# Altium PCB CmosTest20231115V2.PcbDoc (part 1 of 2)
Units mm, origin at the board's own origin, x right, y up, seen from the top; angles counter-clockwise.
Board outline 62.13 x 36.24 mm, 6 copper layers (Top Layer, GND, Signal Layer 1, Signal Layer 2, power, Bottom Layer), stack 1.231 mm thick; 74 components, 61 nets, 321 pads, 164 vias.
Unrouted connection lines stored in the file: 1.
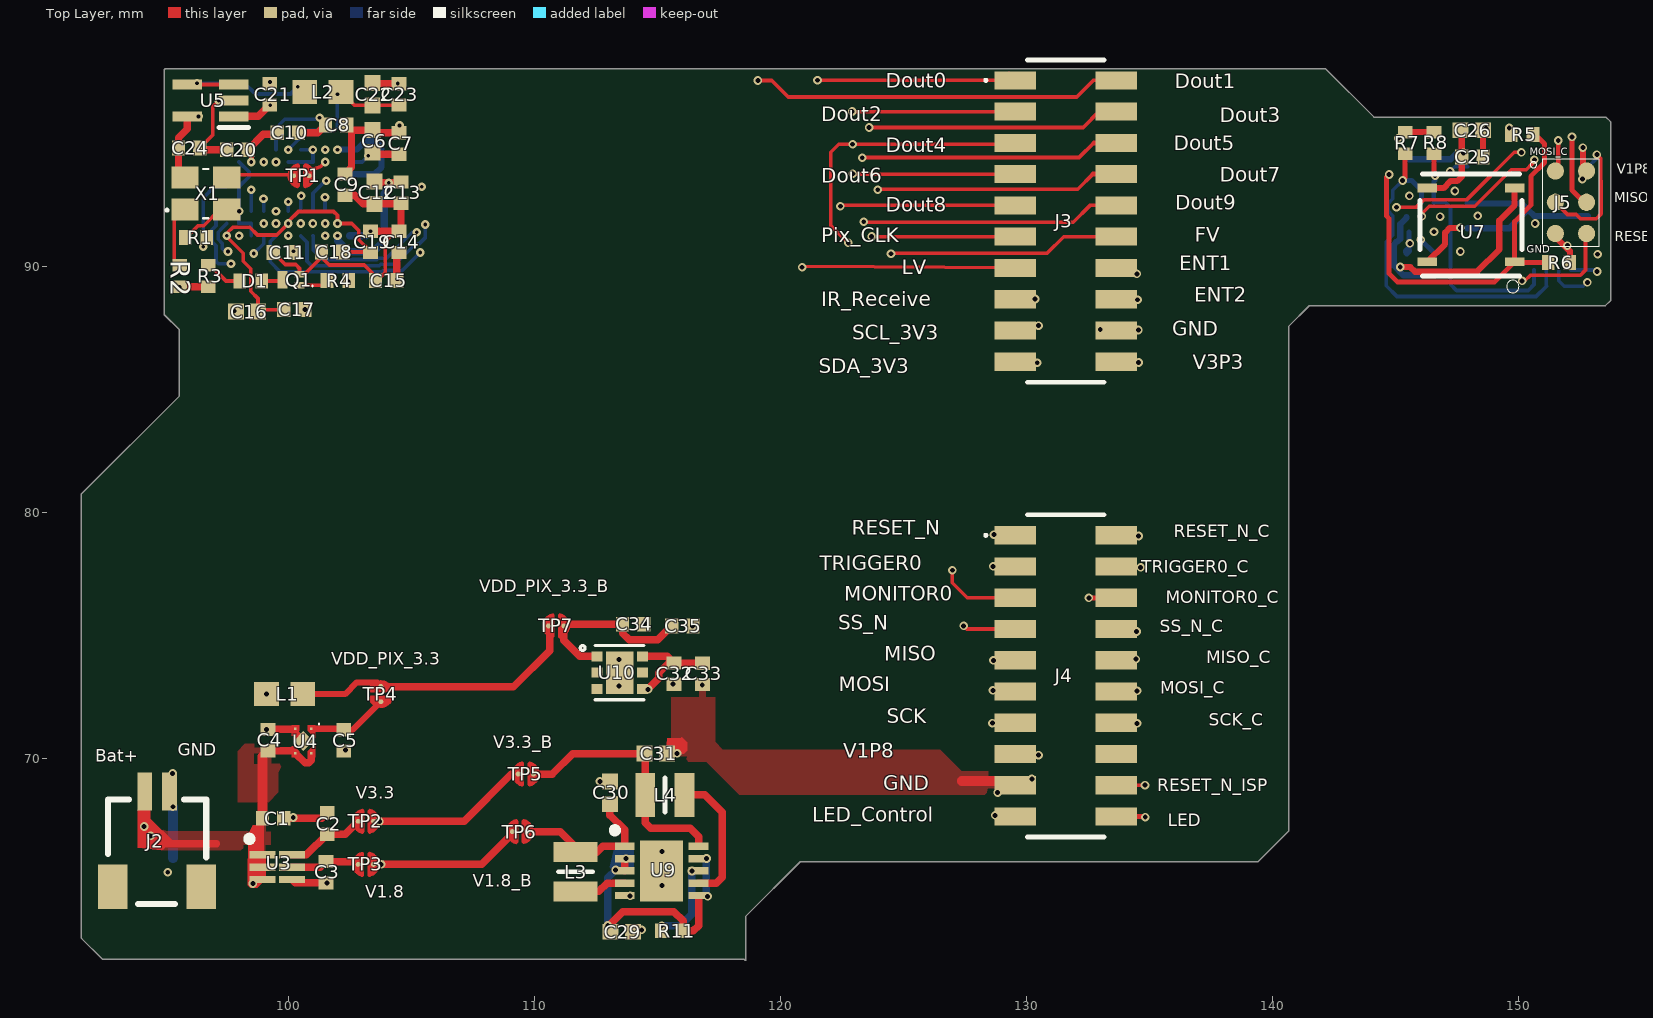
[diagram p0: Top Layer view]
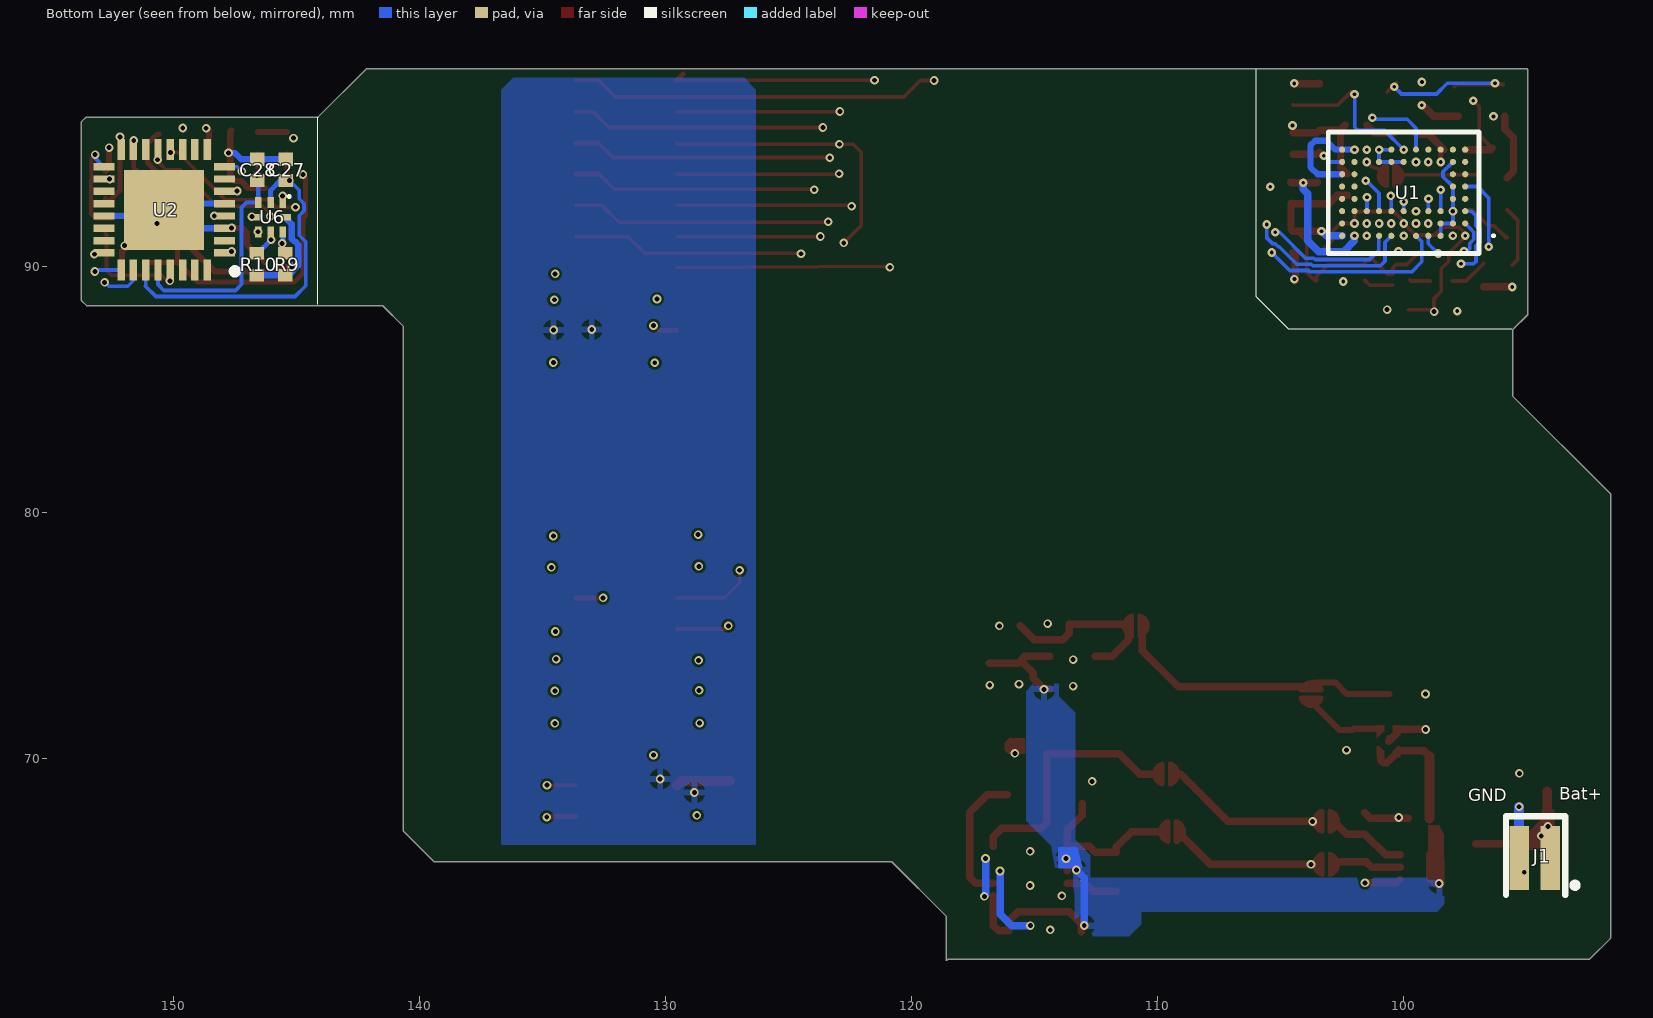
[diagram p1: Bottom Layer view, seen from below]
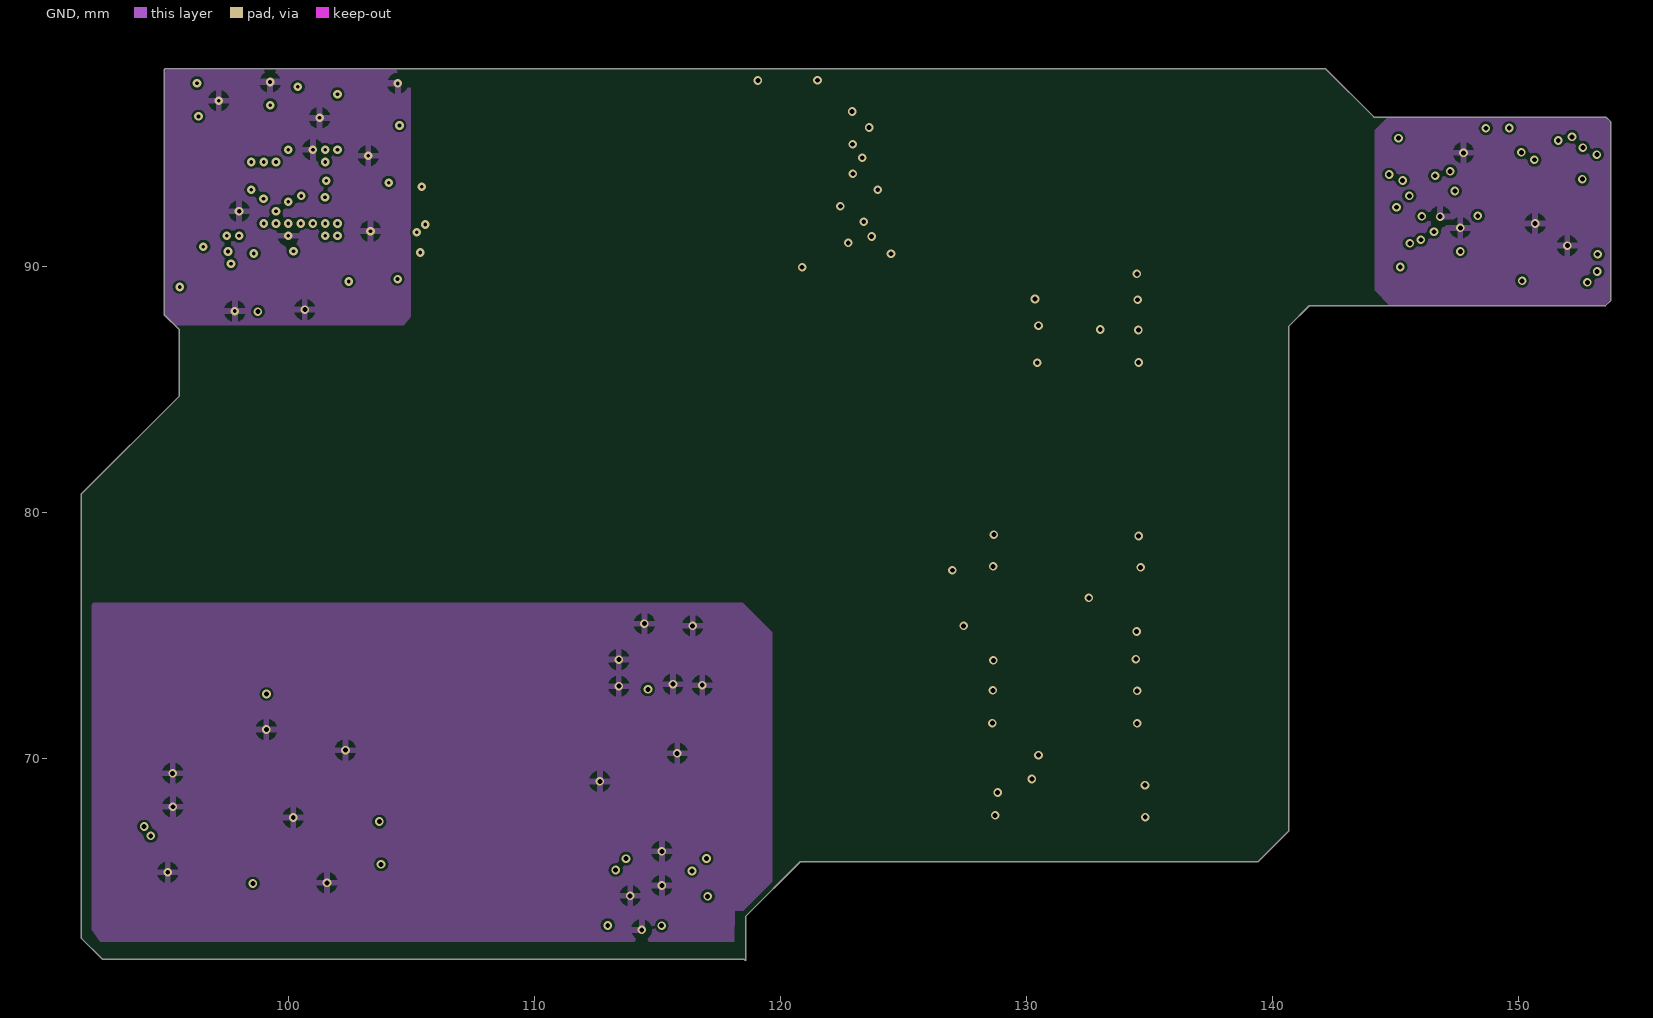
[diagram p2: GND]
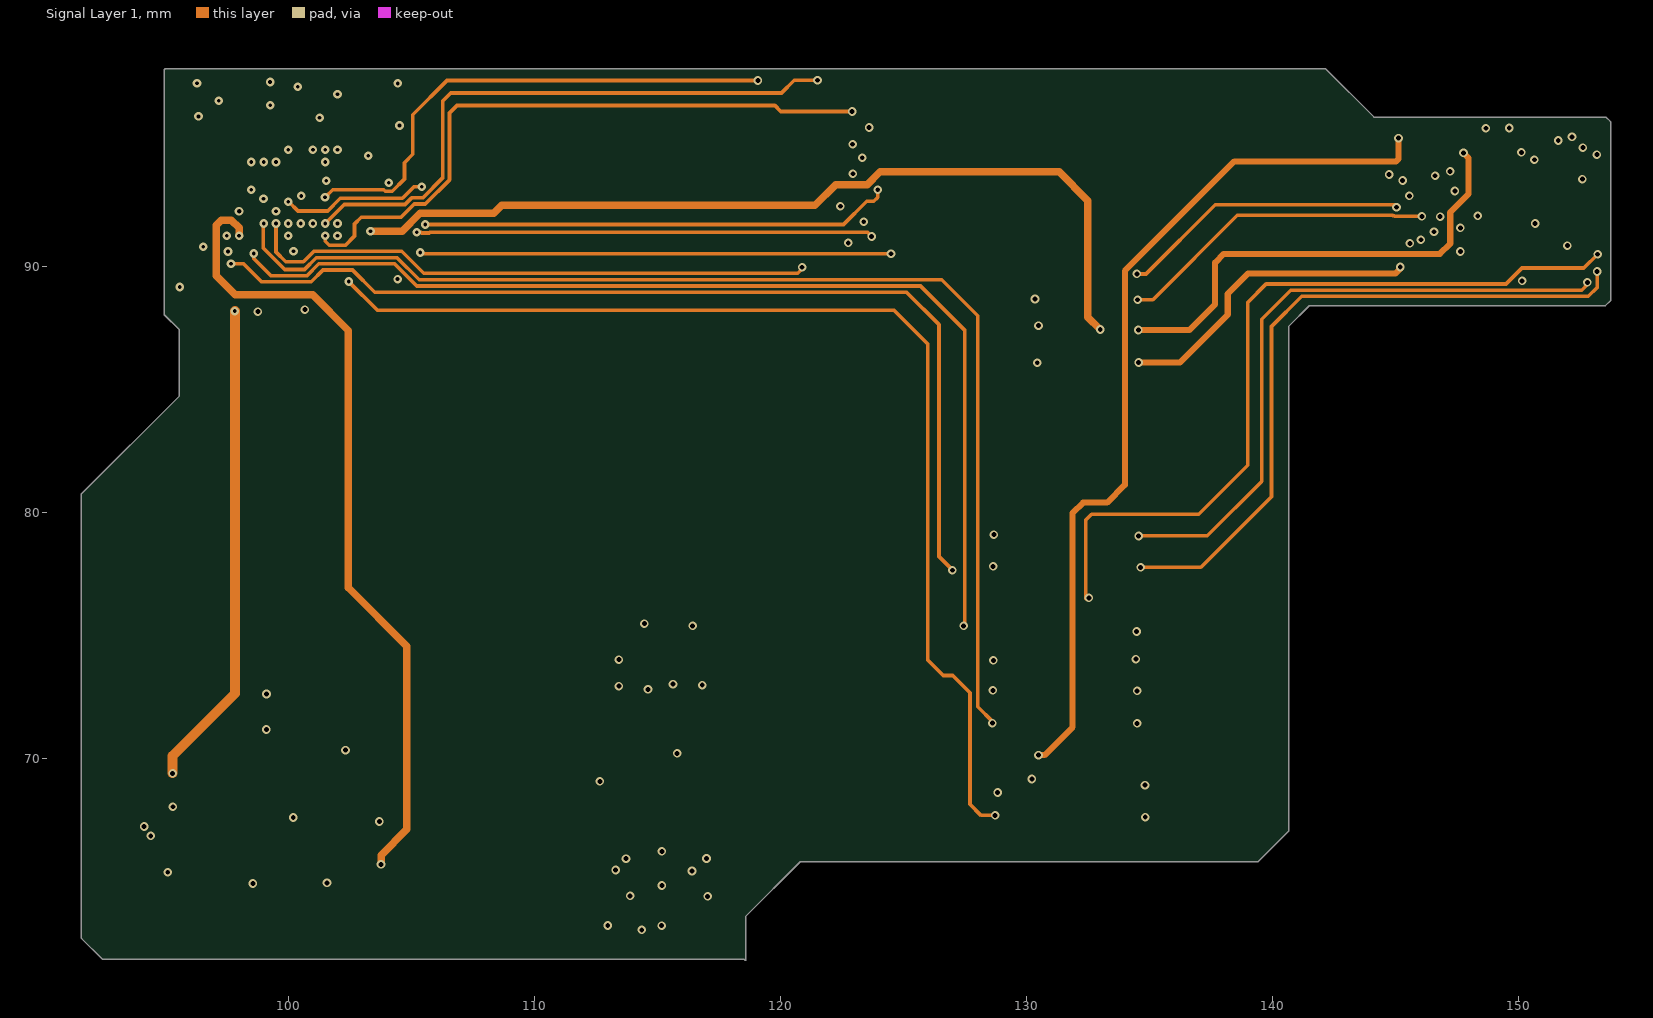
[diagram p3: Signal Layer 1]
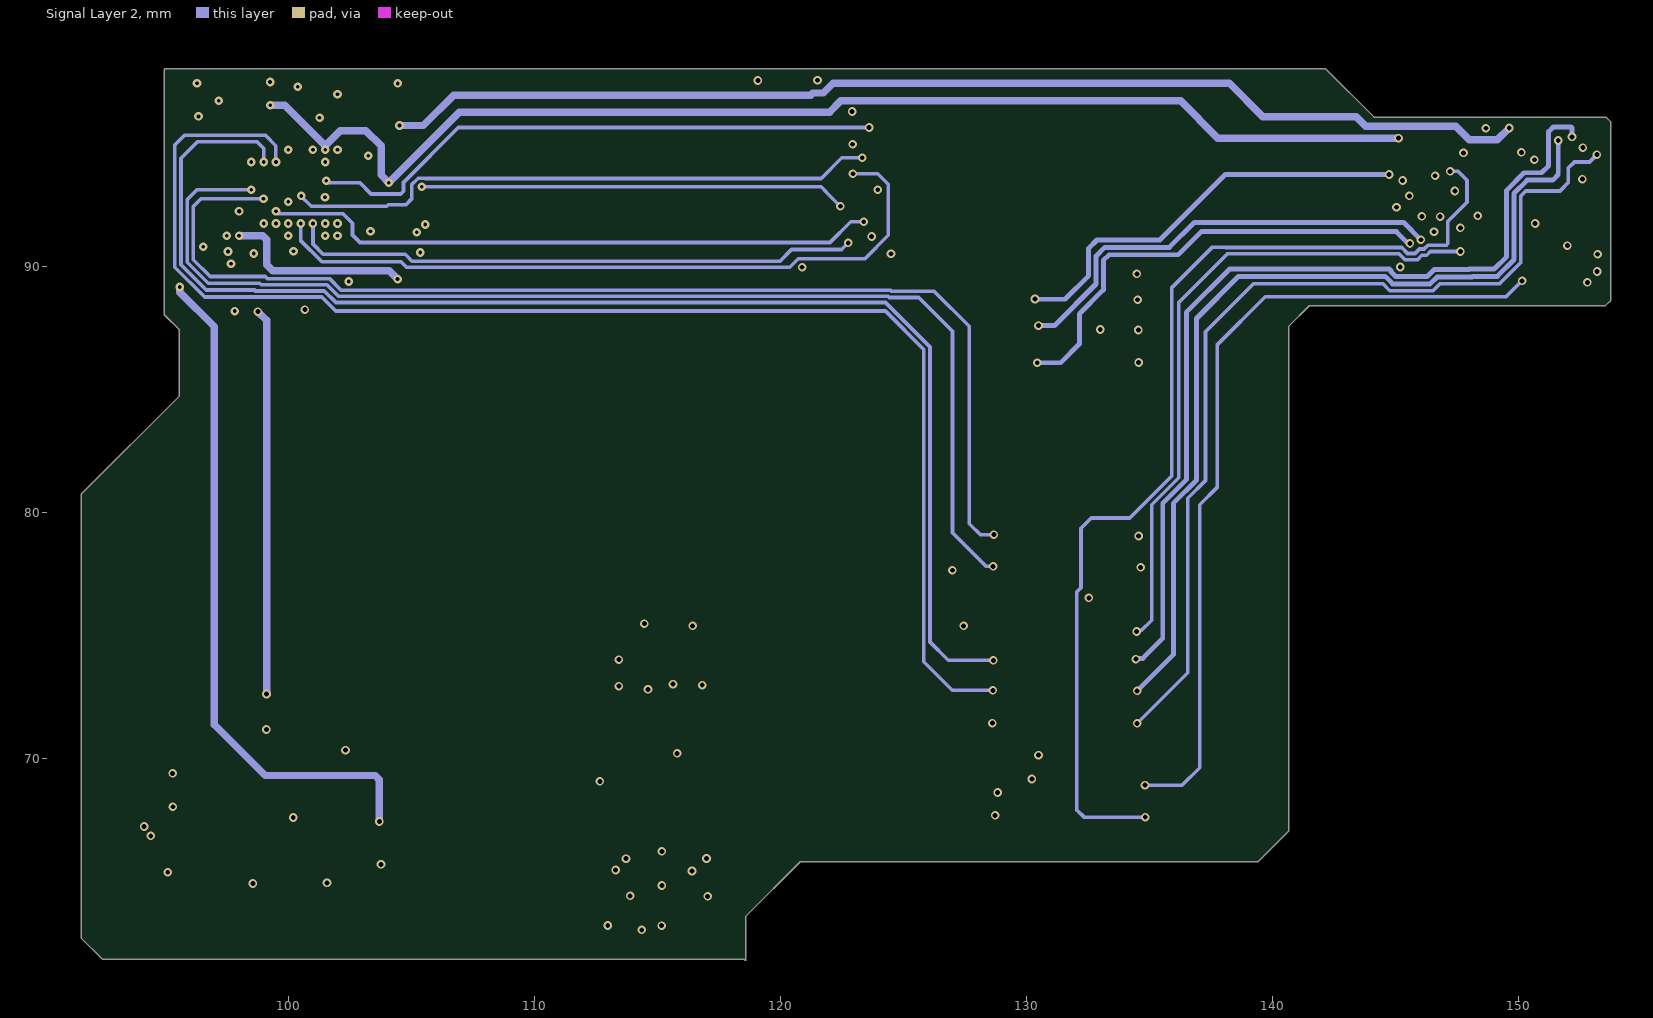
[diagram p4: Signal Layer 2]
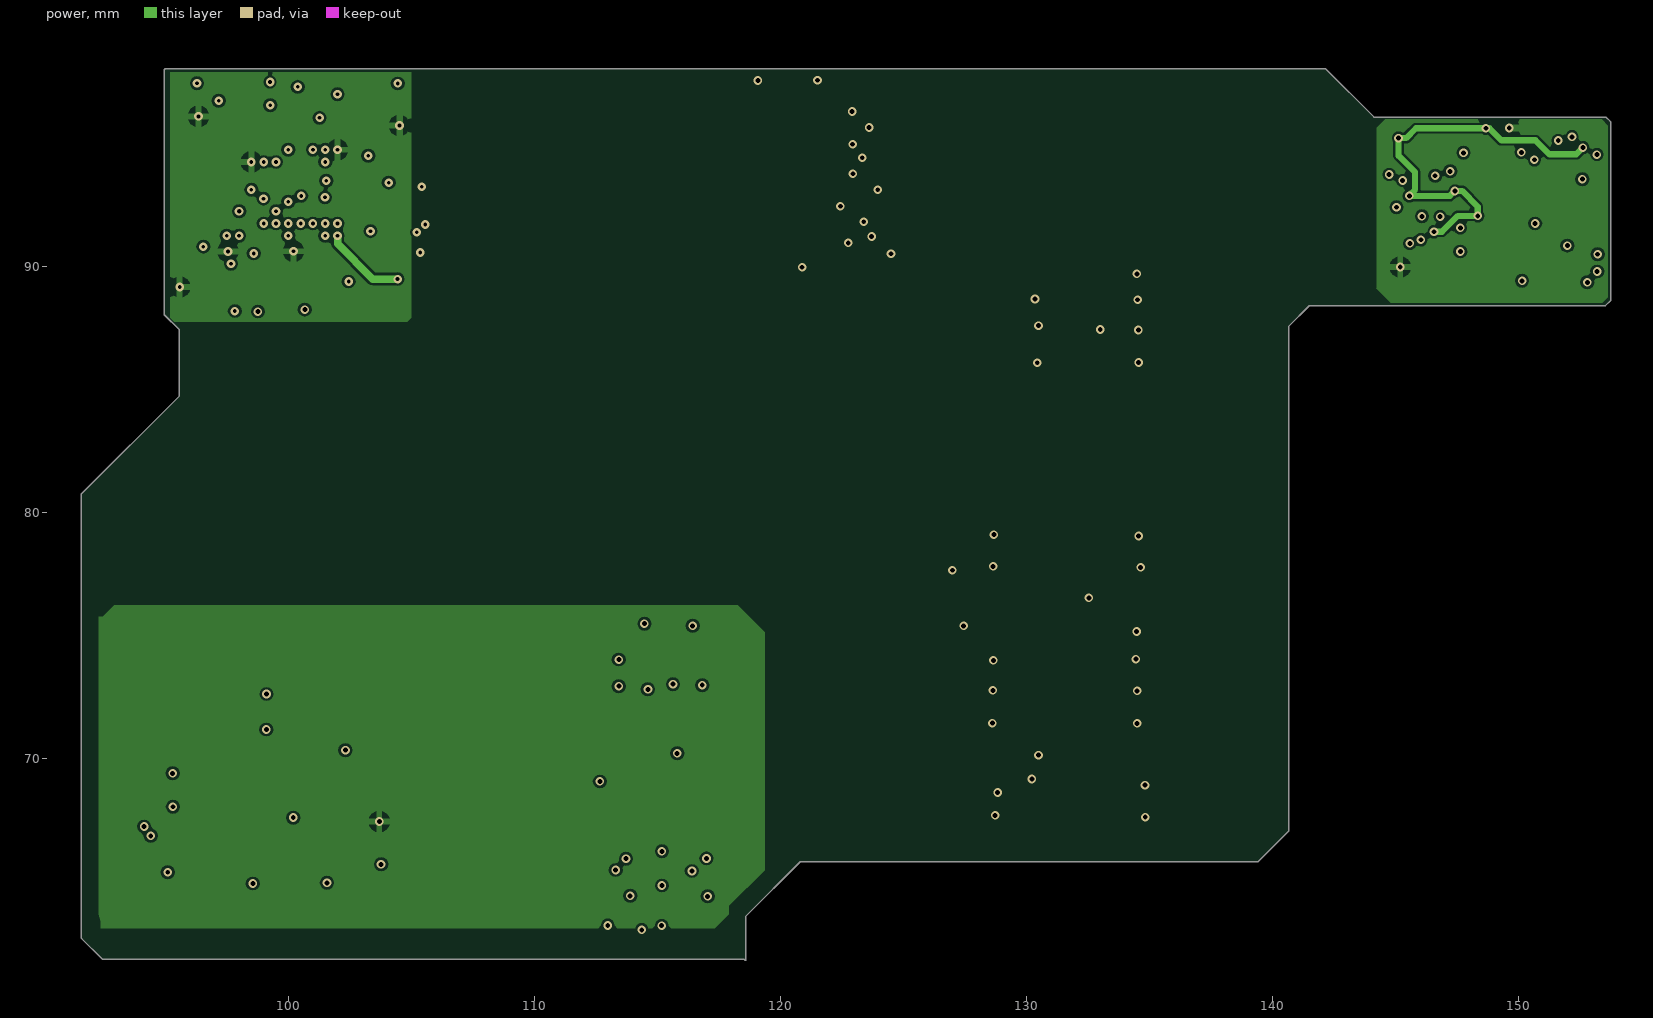
[diagram p5: power]

## Layer stack, top to bottom
Top Solder: solder mask 0.0102, Solder Resist, Dk 3.5
Top Layer: signal copper 0.0356
Dielectric 1: core 0.254, FR-4, Dk 4.2
GND: signal copper 0.036
Dielectric 3: prepreg 0.127, Dk 4.2
Signal Layer 1: signal copper 0.036
Dielectric 5: core 0.254, Dk 4.2
Signal Layer 2: signal copper 0.036
Dielectric 2: prepreg 0.127, Dk 4.2
power: signal copper 0.036
Dielectric 4: core 0.254, Dk 4.2
Bottom Layer: signal copper 0.0356
Bottom Solder: solder mask 0.0102, Solder Resist, Dk 3.5

## Board outline
91.602,62.702 92.452,61.852 cw(c92.47,61.87) 92.452,61.852 ccw(c92.47,61.87) 92.47,61.845 118.519,61.845 118.552,61.812 cw(c118.57,61.83) 118.552,61.812 ccw(c118.57,61.83) 118.595,61.83 118.595,63.609 120.801,65.815 139.39,65.815 ccw(c139.39,65.84) 139.408,65.822 140.638,67.052 cw(c140.62,67.07) 140.638,67.052 ccw(c140.62,67.07) 140.645,67.07 140.645,87.569 141.481,88.405 153.5,88.405 ccw(c153.5,88.43) 153.518,88.412 153.718,88.612 cw(c153.7,88.63) 153.718,88.612 ccw(c153.7,88.63) 153.725,88.63 153.725,95.87 ccw(c153.7,95.87) 153.718,95.888 153.538,96.068 cw(c153.52,96.05) 153.538,96.068 ccw(c153.52,96.05) 153.52,96.075 144.111,96.075 142.148,98.038 cw(c142.13,98.02) 142.148,98.038 ccw(c142.13,98.02) 142.13,98.045 95.01,98.045 ccw(c95.01,98.02) 94.985,98.015 ccw(c94.98,97.99) 94.955,97.99 94.955,88.06 ccw(c94.98,88.06) 94.962,88.042 95.575,87.429 95.575,84.741 91.602,80.768 cw(c91.62,80.75) 91.602,80.768 ccw(c91.62,80.75) 91.595,80.75 91.595,62.72 ccw(c91.62,62.72) 91.602,62.702 cw(c91.62,62.72)

## Design rules (kind name [scope] priority, off if disabled: settings)
Clearance [All] p1: gap=0.1 ignorepadtopadclearanceinfootprint=FALSE except(0: Arc-Hole Track-Hole SMDPad-Hole THPad-Hole Via-Hole Fill-Hole Poly-Hole Region-Hole Text-Hole)
ComponentClearance [All] p1: gap=0.01 collisioncheckmode=3 verticalgap=0.01 showdistances=FALSE
HoleSize [All] p1: absolutevalues=TRUE maxlimit=2.54 minlimit=0.15 maxpercent=80.000 minpercent=20.000
MinimumSolderMaskSliver [All] p1: minsoldermaskwidth=0.1
PolygonConnect [All] p1: connectstyle=Relief reliefconductorwidth=0.254 reliefentries=4 polygonreliefangle="90 Angle" airgapwidth=0.254
RoutingVias [All] p1: holewidth=0.2 width=0.35 viastyle="Through Hole" minholewidth=0.15 minwidth=0.35 maxholewidth=0.711 maxwidth=1.27
SilkToSilkClearance [All] p1: silktosilkclearance=0
SilkToSolderMaskClearance [IsPad] p1: minsilkscreentomaskgap=0 clearancetoexposedcopper=TRUE
SolderMaskExpansion [All] p1: expansion=0.03
Width [All] p1: maxlimit=0.4 minlimit=0.101 preferedwidth=0.152 toplayer_minwidth=0.104 toplayer_prefwidth=0.152 midlayer1_minwidth=0.104 midlayer2_minwidth=0.104 bottomlayer_minwidth=0.104 minimp=50.000000 maximp=50.000000 favimp=50.000000
25 further rules are at their usual default settings.

## Components (designator, comment, footprint, x,y, rotation, side; value= is the part's Value field where it differs from the comment)
C1 "1uF" CAPC1005X55N 99.38,67.58 r180 top
C2 "1uF" CAPC1005X55N 101.58,67.37 r270 top
C3 "1uF" CAPC1005X55N 101.53,65.39 r90 top
C4 "1uF" CAPC1005X55N 99.18,70.76 r270 top
C5 "1uF" CAPC1005X55N 102.25,70.75 r90 top
C6 "10uF" CAPC1005X56N 103.42,95.09 r90 top locked
C7 "0.1uF" CAPC1005X55N 104.5,95 r270 top locked
C8 "0.1uF" CAPC1005X55N 101.939,95.75 r180 top locked
C9 "0.1uF" CAPC1005X55N 102.3,93.328 r270 top locked
C10 "0.1uF" CAPC1005X55N 99.979,95.44 r0 top locked
C11 "0.1uF" CAPC1005X55N 99.819,90.57 r180 top locked
C12 "10uF" CAPC1005X56N 103.5,93 r90 top locked
C13 "0.1uF" CAPC1005X55N 104.58,93 r270 top locked
C14 "0.1uF" CAPC1005X55N 104.5,91 r90 top locked
C15 "0.1uF" CAPC1005X55N 103.978,89.43 r180 top locked
C16 "10uF" CAPC1005X56N 98.315,88.17 r0 top locked
C17 "0.1uF" CAPC1005X55N 100.25,88.25 r0 top locked
C18 "0.1uF" CAPC1005X55N 101.779,90.59 r180 top locked
C19 "0.1uF" CAPC1005X55N 103.34,91 r90 top locked
C20 "0.1uF" CAPC1005X55N 97.932,94.75 r180 top locked
C21 "0.1uF" CAPC1005X55N 99.25,97 r90 top locked
C22 "4.7uf" CAPC1005X56N 103.42,97 r270 top locked
C23 "0.1uF" CAPC1005X55N 104.5,97 r90 top locked
C24 "0.1uF" CAPC1005X55N 95.972,94.815 r0 top locked
C25 "0.1uF" CAPC1005X55N 148.111,94.453 r180 top locked
C26 "4.7uf" CAPC1005X56N 148.086,95.533 r0 top locked
C27 "DP" CAPC1005X55N 145.425,93.93 r90 bottom locked
C28 "DP" CAPC1005X55N 146.585,93.93 r90 bottom locked
C29 "10uF" CAPC1005X56N 113.55,62.97 r180 top
C30 "10uF" CAPC1005X56N 113.07,68.62 r90 top
C31 "10uF" CAPC1005X56N 114.93,70.21 r180 top
C32 "1uf" CAPC1005X55N 115.67,73.46 r90 top
C33 "0.1uF" CAPC1005X55N 116.83,73.45 r270 top
C34 "1uF" CAPC1005X55N 114.012,75.47 r180 top
C35 "DP" CAPC1005X55N 116.01,75.4 r0 top
D1 "VLMS1500-GS08" RESC1005X40N 98.47,89.41 r0 top locked
J1 "Header 2" Head2_pad 94.04,65.96 r270 bottom
J2 "SM02B-SRSS-TB(LF)(SN)" SM02B-SRSS-TB(LF)(SN) 94.67,66.7 r0 top
J3 "X1321WVS-2x10J-C40D53" 62332021021 131.59,91.85 r270 top locked
J4 "X1321WVS-2x10J-C40D53" 62332021021 131.59,73.365 r270 top locked
J5 "Component_1" PCBComponent_1 152.116,92.612 r270 top locked
L1 "BLM18PG471SN1D" BEADC1608X95N 99.85,72.63 r180 top
L2 "BLM18PG471SN1D" BEADC1608X95N 101.404,97.095 r0 top locked
L3 "LQM2MPN2R2MG0L" LQM2MPN1R0NG0L 111.67,65.41 r270 top
L4 "LQM2MPN2R2MG0L" LQM2MPN1R0NG0L 115.3,68.53 r0 top
Q1 "MMBT3904LP-7B" MMBT3904LP7B 100.107,89.463 r180 top locked
R1 "47.5 k" RESC1005X40N 96.25,91.176 r180 top locked
R2 "DP" RESC1005X40N 95.59,89.616 r90 top locked
R3 "RC0402FR-071K8L" RESC1005X40N 96.75,89.616 r90 top locked
R4 "1k" RESC1005X40N 102.018,89.43 r180 top locked
R5 "DP" RESC1005X40N 150.13,95.37 r0 top locked
R6 "DP" RESC1005X40N 151.63,90.16 r0 top locked
R7 "DP" RESC1005X40N 145.38,95.02 r270 top locked
R8 "DP" RESC1005X40N 146.55,95.02 r270 top locked
R9 "RC0402FR-071K8L" RESC1005X40N 145.44,90.093 r270 bottom locked
R10 "RC0402FR-071K8L" RESC1005X40N 146.6,90.093 r270 bottom locked
R11 "DP" RESC1005X40N 115.605,63.01 r0 top
TP1 "Solderbridge" Solderbridge#1 100.532,93.69 r0 top locked
TP2 "Solderbridge" Solderbridge#2 103.152,67.46 r180 top
TP3 "Solderbridge" Solderbridge#2 103.15,65.71 r180 top
TP4 "Solderbridge" Solderbridge#1 103.76,72.63 r270 top
TP5 "Solderbridge" Solderbridge#3 109.652,69.38 r0 top
TP6 "Solderbridge" Solderbridge#3 109.412,67.04 r0 top
TP7 "Solderbridge" Solderbridge#2 110.882,75.4 r0 top
U1 "NOIP1SP0480A-STI" NOIP1SP0480ASTI 100,93 r0 bottom locked
U2 "ATMEGA328-MU" QFN50P500X500X100-33N-D 150.366,92.306 r0 bottom locked
U3 "TLV7103318DSER" SON50P150X150X80-6N 99.545,65.595 r0 top
U4 "NCP163AMX330TBG" REG_NCP114AMX330TBG 100.614,70.72 r180 top
U5 "LMV321IDCKR" SOT65P210X110-5N 96.84,96.75 r180 top locked
U6 "PCA9509PGM_125" PCA9509PGM125 146.04,92.005 r270 bottom locked
U7 "TSOP57438TT1" TSOP572 148.052,91.689 r90 top locked
U9 "LTC3407EDD-3#PBF" SON50P300X300X80-11N-D 115.17,65.444 r0 top
U10 "NCP705MT33TCG" WDFN6 113.46,73.5 r270 top
X1 "SG-210STF_66.6667ML3" SG210STF625000ML3 96.65,92.963 r0 top locked

## Footprints (in the part's own frame and the unit in brackets; to place one, negate y for a bottom-side part, rotate by r counter-clockwise, add the part's x,y. Pads: shape width x height; smd on the part's side, far side on the other; paste and mask are expansions set on the pad)
62332021021 [mm]
  rect 0.74x1.7 smd: 1(-5.715,-2.05) 2(-5.715,2.05) 3(-4.445,-2.05) 4(-4.445,2.05) 5(-3.175,-2.05) 6(-3.175,2.05) 7(-1.905,-2.05) 8(-1.905,2.05) 9(-0.635,-2.05) 10(-0.635,2.05) 11(0.635,-2.05) 12(0.635,2.05) 13(1.905,-2.05) 14(1.905,2.05) 15(3.175,-2.05) 16(3.175,2.05) 17(4.445,-2.05) 18(4.445,2.05) 19(5.715,-2.05) 20(5.715,2.05)
  silkscreen extent -6.55,-3.3 6.55,1.55
BEADC1608X95N [mm]
  rect 1x0.97 smd: 1(-0.735,0) 2(0.735,0)
CAPC1005X55N [mm]
  rect 0.54x0.6 smd: 1(-0.432,0) 2(0.432,0)
CAPC1005X56N [mm]
  rect 0.65x0.64 smd: 1(-0.45,0) 2(0.45,0)
Head2_pad [mm]
  rect 2.6x0.8 smd: 1(0,0) 2(0,-1.27)
  silkscreen extent -1.7,-1.8 1.5,1.1
LQM2MPN1R0NG0L [mm]
  rect 0.8x1.8 smd: 1(-0.8,0) 2(0.8,0)
  silkscreen extent 0,-0.7 0,0.7
MMBT3904LP7B [mm]
  rect 0.4x0.25 smd: 1(-0.35,0.225) 2(-0.35,-0.225)
  rect 0.4x0.7 smd: 3(0.35,0)
  silkscreen extent -0.9,0.23 -0.85,0.27
NOIP1SP0480ASTI [mm]
  round 0.25 smd: A1(-2.5,1.75) A2(-2,1.75) A3(-1.5,1.75) A4(-1,1.75) A5(-0.5,1.75) A6(0,1.75) A7(0.5,1.75) A8(1,1.75) A9(1.5,1.75) A10(2,1.75) A11(2.5,1.75) B1(-2.5,1.25) B2(-2,1.25) B3(-1.5,1.25) B4(-1,1.25) B5(-0.5,1.25) B6(0,1.25) B7(0.5,1.25) B8(1,1.25) B9(1.5,1.25) B10(2,1.25) B11(2.5,1.25) C1(-2.5,0.75) C2(-2,0.75) C3(-1.5,0.75) C4(-1,0.75) C5(-0.5,0.75) C6(0,0.75) C7(0.5,0.75) C8(1,0.75) C9(1.5,0.75) C10(2,0.75) C11(2.5,0.75) D1(-2.5,0.25) D2(-2,0.25) D10(2,0.25) D11(2.5,0.25) E1(-2.5,-0.25) E2(-2,-0.25) E10(2,-0.25) E11(2.5,-0.25) F1(-2.5,-0.75) F2(-2,-0.75) F10(2,-0.75) F11(2.5,-0.75) G1(-2.5,-1.25) G2(-2,-1.25) G3(-1.5,-1.25) G4(-1,-1.25) G5(-0.5,-1.25) G6(0,-1.25) G7(0.5,-1.25) G8(1,-1.25) G9(1.5,-1.25) G10(2,-1.25) G11(2.5,-1.25) H1(-2.5,-1.75) H2(-2,-1.75) H3(-1.5,-1.75) H4(-1,-1.75) H5(-0.5,-1.75) H6(0,-1.75) H7(0.5,-1.75) H8(1,-1.75) H9(1.5,-1.75) H10(2,-1.75) H11(2.5,-1.75)
  silkscreen extent -3.7,-2.46 3.07,2.46
PCA9509PGM125 [mm]
  rect 0.45x0.27 smd: 1(-0.6,0.5) 2(-0.6,0) 3(-0.6,-0.5) 5(0.6,-0.5) 6(0.6,0) 7(0.6,0.5)
  rect 0.27x0.45 smd: 4(0,-0.6) 8(0,0.6)
  silkscreen extent -0.89,0.7 -0.79,0.8
PCBComponent_1 [mm]
  round 0.7 smd: 1(-1.27,-0.635) 2(-1.27,0.635) 3(0,-0.635) 4(0,0.635) 5(1.27,-0.635) 6(1.27,0.635)
  silkscreen extent -1.78,-1.65 1.78,1.14
QFN50P500X500X100-33N-D [mm]
  rect 0.85x0.3 smd: 1(-2.45,1.75) 2(-2.45,1.25) 3(-2.45,0.75) 4(-2.45,0.25) 5(-2.45,-0.25) 6(-2.45,-0.75) 7(-2.45,-1.25) 8(-2.45,-1.75) 17(2.45,-1.75) 18(2.45,-1.25) 19(2.45,-0.75) 20(2.45,-0.25) 21(2.45,0.25) 22(2.45,0.75) 23(2.45,1.25) 24(2.45,1.75)
  rect 0.3x0.85 smd: 9(-1.75,-2.45) 10(-1.25,-2.45) 11(-0.75,-2.45) 12(-0.25,-2.45) 13(0.25,-2.45) 14(0.75,-2.45) 15(1.25,-2.45) 16(1.75,-2.45) 25(1.75,2.45) 26(1.25,2.45) 27(0.75,2.45) 28(0.25,2.45) 29(-0.25,2.45) 30(-0.75,2.45) 31(-1.25,2.45) 32(-1.75,2.45)
  rect 3.25x3.25 smd: 33(0,0)
  silkscreen extent -3,2.38 -2.75,2.62
REG_NCP114AMX330TBG [mm]
  rect 0.1x0.1 smd paste-1 mask+0: 1(-0.325,-0.5) 2(0.325,-0.5) 3(0.325,0.5) 4(-0.325,0.5)
  rect 0.58x0.58 smd rot 45 mask+0: 5(0,0)
  Top Layer region: 0.475,0.22 0.375,0.22 0.175,0.42 0.175,0.65 0.475,0.65
  Top Layer region: 0.475,-0.65 0.175,-0.65 0.175,-0.42 0.375,-0.22 0.475,-0.22
  Top Layer region: -0.175,0.42 -0.375,0.22 -0.475,0.22 -0.475,0.65 -0.175,0.65
  Top Layer region: -0.175,-0.42 -0.175,-0.65 -0.475,-0.65 -0.475,-0.12
  silkscreen extent -0.66,-0.71 -0.61,-0.66
RESC1005X40N [mm]
  rect 0.51x0.6 smd: 1(-0.445,0) 2(0.445,0)
SG210STF625000ML3 [mm]
  rect 1.1x0.9 smd: 1(-0.85,-0.65) 2(0.85,-0.65) 3(0.85,0.65) 4(-0.85,0.65)
  silkscreen extent -1.63,-1 0.1,1
SM02B-SRSS-TB(LF)(SN) [mm]
  rect 0.6x1.55 smd: 1(-0.5,1.975) 2(0.5,1.975)
  rect 1.2x1.8 smd: 3(-1.8,-1.9) 4(1.8,-1.9)
  silkscreen extent -2,-2.6 2,1.65
Solderbridge#1 [mm]
  round 0.2 smd paste-10: 1(-0.312,0) 2(0.312,0)
  Top Layer region: -0.077,-0.432 -0.152,-0.505 -0.271,-0.467 -0.335,-0.424 -0.409,-0.351 -0.462,-0.292 -0.521,-0.193 -0.549,-0.099 -0.544,0.122 -0.518,0.193 -0.434,0.33 -0.351,0.411 -0.259,0.469 -0.157,0.5 -0.107,0.483 -0.077,0.43
  Top Layer region: 0.077,0.432 0.152,0.505 0.271,0.467 0.335,0.424 0.409,0.351 0.462,0.292 0.521,0.193 0.549,0.099 0.544,-0.122 0.518,-0.193 0.434,-0.33 0.351,-0.411 0.259,-0.469 0.157,-0.5 0.107,-0.483 0.077,-0.43
  Top Layer lines w0.152: -0.153,-0.431 cw(c-0.042,0) -0.461,0.149 cw(c-0.042,0) -0.331,0.338 cw(c-0.042,0) -0.153,0.431 ; 0.153,-0.431 ccw(c0.042,0) 0.312,-0.353 ccw(c0.042,0) 0.487,0 ccw(c0.042,0) 0.396,0.269 ccw(c0.042,0) 0.312,0.353 ccw(c0.042,0) 0.153,0.431
Solderbridge#2 [mm]
  round 0.2 smd paste-10: 1(-0.312,0) 2(0.312,0)
  Top Layer region: -0.077,-0.432 -0.152,-0.505 -0.271,-0.467 -0.335,-0.424 -0.409,-0.351 -0.462,-0.292 -0.521,-0.193 -0.549,-0.099 -0.544,0.122 -0.518,0.193 -0.434,0.33 -0.351,0.411 -0.259,0.469 -0.157,0.5 -0.107,0.483 -0.077,0.43
  Top Layer region: 0.077,0.432 0.152,0.505 0.271,0.467 0.335,0.424 0.409,0.351 0.462,0.292 0.521,0.193 0.549,0.099 0.544,-0.122 0.518,-0.193 0.434,-0.33 0.351,-0.411 0.259,-0.469 0.157,-0.5 0.107,-0.483 0.077,-0.43
  Top Layer lines w0.152: 0.153,0.431 cw(c0.042,0) 0.396,0.269 cw(c0.042,0) 0.461,0.149 cw(c0.042,0) 0.487,0 cw(c0.042,0) 0.312,-0.353 cw(c0.042,0) 0.153,-0.431 ; -0.153,0.431 ccw(c-0.042,0) -0.487,0 ccw(c-0.042,0) -0.153,-0.431
Solderbridge#3 [mm]
  round 0.2 smd paste-10: 1(-0.312,0) 2(0.312,0)
  Top Layer region: -0.077,-0.432 -0.152,-0.505 -0.271,-0.467 -0.335,-0.424 -0.409,-0.351 -0.462,-0.292 -0.521,-0.193 -0.549,-0.099 -0.544,0.122 -0.518,0.193 -0.434,0.33 -0.351,0.411 -0.259,0.469 -0.157,0.5 -0.107,0.483 -0.077,0.43
  Top Layer region: 0.077,0.432 0.152,0.505 0.271,0.467 0.335,0.424 0.409,0.351 0.462,0.292 0.521,0.193 0.549,0.099 0.544,-0.122 0.518,-0.193 0.434,-0.33 0.351,-0.411 0.259,-0.469 0.157,-0.5 0.107,-0.483 0.077,-0.43
  Top Layer lines w0.152: -0.153,-0.431 cw(c-0.042,0) -0.487,0 cw(c-0.042,0) -0.153,0.431 ; 0.153,-0.431 ccw(c0.042,0) 0.312,-0.353 ccw(c0.042,0) 0.487,0 ccw(c0.042,0) 0.396,0.269 ccw(c0.042,0) 0.153,0.431
SON50P150X150X80-6N [mm]
  rect 1.05x0.3 smd: 1(-0.6,0.5) 2(-0.6,0) 3(-0.6,-0.5) 4(0.6,-0.5) 5(0.6,0) 6(0.6,0.5)
  silkscreen extent -1.25,1.03 -1,1.27
SON50P300X300X80-11N-D [mm]
  rect 0.8x0.3 smd: 1(-1.5,1) 2(-1.5,0.5) 3(-1.5,0) 4(-1.5,-0.5) 5(-1.5,-1) 6(1.5,-1) 7(1.5,-0.5) 8(1.5,0) 9(1.5,0.5) 10(1.5,1)
  rect 1.75x2.48 smd: 11(0,0)
  silkscreen extent -2.02,1.53 -1.77,1.77
SOT65P210X110-5N [mm]
  rect 1.2x0.4 smd: 1(-0.95,0.65) 2(-0.95,0) 3(-0.95,-0.65) 4(0.95,-0.65) 5(0.95,0.65)
  silkscreen extent -1.55,1.1 -0.35,1.1
TSOP572 [mm]
  rect 0.35x0.8 smd: 1(-1.5,-1.775) 5(1.5,-1.775) 6(1.5,1.775) 8(-1.5,1.775)
  silkscreen extent -2.75,-2.08 2.08,2.08
WDFN6 [mm]
  rect 0.4x0.45 smd: 1(-0.66,-0.925) 2(0,-0.925) 3(0.66,-0.925) 4(0.66,0.925) 5(0,0.925) 6(-0.66,0.925)
  rect 1.72x1.12 smd: GND(0,0)
  silkscreen extent -1.1,-1.6 1.1,1

## Part data
C1 C4 C5 C34: library part CC0402KRX5R6BB105, "General purpose & High capacitance Class 2, X5R", Manufacturer_Name=KEMET, Mouser Part Number=603-CC402KRX5R6BB105, Datasheet Link=https://www.mouser.co.uk/datasheet/2/447/UPY-GPHC_X5R_4V-to-50V_25-1131599.pdf, Geometry.Height=0.55mm, Manufacturer_Part_Number=CC0402KRX5R6BB105, Mouser Price/Stock=https://www.mouser.co.uk/ProductDetail/YAGEO/CC0402KRX5R6BB105?qs=BKNoF%2F0xMNu0TvpE6ze2Iw%3D%3D
C2: library part CC0402KRX5R6BB105, "CC0402KRX5R6BB105;General purpose & High capacitance Class 2, X5R", Manufacturer_Name=KEMET, Mouser Part Number=603-CC402KRX5R6BB105, Datasheet Link=https://www.mouser.co.uk/datasheet/2/447/UPY-GPHC_X5R_4V-to-50V_25-1131599.pdf, Geometry.Height=0.55mm, Manufacturer_Part_Number=CC0402KRX5R6BB105, Mouser Price/Stock=https://www.mouser.co.uk/ProductDetail/YAGEO/CC0402KRX5R6BB105?qs=BKNoF%2F0xMNu0TvpE6ze2Iw%3D%3D
C3: library part CC0402KRX5R6BB105, "CC0402KRX5R6BB105; General purpose & High capacitance Class 2, X5R", Manufacturer_Name=KEMET, Mouser Part Number=603-CC402KRX5R6BB105, Datasheet Link=https://www.mouser.co.uk/datasheet/2/447/UPY-GPHC_X5R_4V-to-50V_25-1131599.pdf, Geometry.Height=0.55mm, Manufacturer_Part_Number=CC0402KRX5R6BB105, Mouser Price/Stock=https://www.mouser.co.uk/ProductDetail/YAGEO/CC0402KRX5R6BB105?qs=BKNoF%2F0xMNu0TvpE6ze2Iw%3D%3D
C6 C12 C16 C29 C30 C31: library part 0402ZD106MAT2A, "0402ZD106MAT2A; Multilayer Ceramic Capacitors MLCC - SMD/SMT 10V 10uF X5R 0402 20% Tol", Manufacturer_Name=AVX, Mouser Part Number=581-0402ZD106MAT2A, Arrow Part Number=0402ZD106MAT2A, Arrow Price/Stock=https://www.arrow.com/en/products/0402zd106mat2a/avx, Datasheet Link=http://www.mouser.com/catalog/supplier/library/pdf/AVXSurfaceMountCeramic.pdf, Geometry.Height=0.56mm, Manufacturer_Part_Number=0402ZD106MAT2A, Mouser Price/Stock=https://www.mouser.co.uk/ProductDetail/AVX/0402ZD106MAT2A?qs=sJ5gq5MLFXpDfmjiItAxIg%3D%3D
C7 C8 C9 C10 C11 C13 C14 C15 C17 C18 C19 C20 C21 C23 C24 C25 C27 C28: library part GRM155R71C104KA88D, "SMD Capacitor X7R_EIA_ with Capacitance: 0.10uF Tol. 10%. Rated Voltage: 16Vdc;GRM155R71C104KA88D", Package="1005 Taiyo Yuden", MF=Murata, MP=GRM155R71C104KA88D, SnapEDA_Link=https://www.snapeda.com/parts/GRM155R71C104KA88D/Murata%20Electronics%20North%20America/view-part/4750/?ref=snap
C22 C26: library part 0402ZD475KAT2A, "0402ZD475KAT2A; Multilayer Ceramic Capacitors MLCC - SMD/SMT 10V 4.7uF 0402 10% CX5R", Manufacturer_Name=AVX, Mouser Part Number=581-0402ZD475KAT2A, Arrow Part Number=0402ZD475KAT2A, Arrow Price/Stock=https://www.arrow.com/en/products/0402zd475kat2a/avx, Datasheet Link=http://www.mouser.com/catalog/supplier/library/pdf/AVXSurfaceMountCeramic.pdf, Geometry.Height=0.56mm, Manufacturer_Part_Number=0402ZD475KAT2A, Mouser Price/Stock=https://www.mouser.co.uk/ProductDetail/AVX/0402ZD475KAT2A?qs=%252BdQmOuGyFcGZ9hW2HGkxhw%3D%3D
C32 C33 C35: library part GRM155R71C104KA88D, "SMD Capacitor X7R_EIA_ with Capacitance: 0.10uF Tol. 10%. Rated Voltage: 16Vdc", Package="1005 Taiyo Yuden", MF=Murata, MP=GRM155R71C104KA88D, SnapEDA_Link=https://www.snapeda.com/parts/GRM155R71C104KA88D/Murata%20Electronics%20North%20America/view-part/4750/?ref=snap
D1: library part VLMG1500-GS08, "Super red 631nm LED Indication - Discrete 2V 0402 _1005 Metric_", Package="0402 Vishay", Availability=Unavailable, MF=Vishay, MP=VLMG1500-GS08, Price=None, SnapEDA_Link=https://www.snapeda.com/parts/VLMG1500-GS08/Vishay%20Semiconductor%20Opto%20Division/view-part/450066/?ref=snap
J1: "Header, 2-Pin", LatestRevisionDate=17-Jul-2002, LatestRevisionNote="Re-released for DXP Platform.", Publisher="Altium Limited"
J2: "Connector Header Surface Mount, Right Angle 2 position 0.039 _1.00mm_", Package=None, Availability=Unavailable, MF="JST Sales", MP=SM02B-SRSS-TB_LF__SN_, Price=None, SnapEDA_Link=https://www.snapeda.com/parts/SM02B-SRSS-TB%28LF%29%28SN%29/JST%20Sales%20America%20Inc./view-part/447499/?ref=snap
J3 J4: library part 62332021021, "X1321WVS-2x10J-C40D53; / Receptacle, Board-to-Board, 1.27 mm, 2 Rows, 20 Contacts, Surface Mount, WR-PHD Series", Manufacturer_Name="Wurth Elektronik", Mouser Part Number=710-62332021021, Datasheet Link=https://componentsearchengine.com/Datasheets/2/62332021021.pdf, Geometry.Height=4.7mm, Manufacturer_Part_Number=62332021021, Mouser Price/Stock=https://www.mouser.co.uk/ProductDetail/Wurth-Elektronik/62332021021?qs=7D1LtPJG0i3NvUz0HzEmOg%3D%3D
L1 L2: "470 Ohms @ 100MHz 1 Power Line Ferrite Bead 0603 _1608 Metric_ 1A 200mOhm", Package="1608 Murata", Digi-Key_Part_Number=490-5223-1-ND, Digi-Key_Purchase_URL=https://www.digikey.com.au/product-detail/en/murata-electronics/BLM18PG471SN1D/490-5223-1-ND/1948399?utm_source=snapeda&utm_medium=aggregator&utm_campaign=symbol, MF=Murata, MP=BLM18PG471SN1D, SnapEDA_Link=https://www.snapeda.com/parts/BLM18PG471SN1D/Murata/view-part/234090/?ref=snap
L3 L4: "LQM2MPN_G0 Series Inductor 2.2uH +/-20% 0806 (2016)", Manufacturer_Name="Murata Electronics", Mouser Part Number=81-LQM2MPN2R2MG0L, Arrow Part Number=LQM2MPN2R2MG0L, Arrow Price/Stock=https://www.arrow.com/en/products/lqm2mpn2r2mg0l/murata-manufacturing?region=nac, Datasheet Link=https://psearch.en.murata.com/inductor/product/LQM2MPN2R2MG0%23.html, Geometry.Height=1mm, Manufacturer_Part_Number=LQM2MPN2R2MG0L, Mouser Price/Stock=https://www.mouser.co.uk/ProductDetail/Murata-Electronics/LQM2MPN2R2MG0L?qs=YinlzBdtFMj9%2Fj5t8GanUg%3D%3D
Q1: "Bipolar Transistors - BJT General Purpose Tran X1-DFN1006-3,10K 40V NPN SMALL SIGNAL TRANSISTOR IN X1-DFN1006-3", Manufacturer_Name="Diodes Inc.", Mouser Part Number=621-MMBT3904LP-7B, Arrow Part Number=MMBT3904LP-7B, Arrow Price/Stock=https://www.arrow.com/en/products/mmbt3904lp-7b/diodes-incorporated?region=nac, Datasheet Link=https://www.diodes.com/assets/Datasheets/ds31835.pdf, Geometry.Height=0.53mm, Manufacturer_Part_Number=MMBT3904LP-7B, Mouser Price/Stock=https://www.mouser.co.uk/ProductDetail/Diodes-Incorporated/MMBT3904LP-7B?qs=T%2FOtf55vL7cbkUjr%2FmBpPQ%3D%3D
R1: library part ERJ-2RKF4752X, "ERJ-2RKF4752X; Panasonic Surface Mount Fixed Resistor 47.5 k 0.1 W +/-100 ppm/C", Manufacturer_Name=Panasonic, Mouser Part Number=667-ERJ-2RKF4752X, Arrow Part Number=ERJ-2RKF4752X, Arrow Price/Stock=https://www.arrow.com/en/products/erj-2rkf4752x/panasonic, Datasheet Link=https://industrial.panasonic.com/cdbs/www-data/pdf/RDA0000/AOA0000C86.pdf, Geometry.Height=0.4mm, Manufacturer_Part_Number=ERJ-2RKF4752X, Mouser Price/Stock=https://www.mouser.co.uk/ProductDetail/Panasonic/ERJ-2RKF4752X?qs=YMBIwoNQYdVljEm11tR4kg%3D%3D
R2 R5 R6 R7 R8 R11: library part RC0402FR-071K8L, "Don't place; RESISTOR, 0402", Manufacturer_Name=KEMET, Mouser Part Number=603-RC0402FR-071K8L, Arrow Part Number=RC0402FR-071K8L, Arrow Price/Stock=https://www.arrow.com/en/products/rc0402fr-071k8l/yageo, Datasheet Link=http://www.yageo.com/documents/recent/PYu-RC0402_51_RoHS_L_6_r.pdf, Geometry.Height=0.4mm, Manufacturer_Part_Number=RC0402FR-071K8L, Mouser Price/Stock=https://www.mouser.co.uk/ProductDetail/Yageo/RC0402FR-071K8L/?qs=YUgVZYePFqBqgTt42z3XkQ%3D%3D
R3 R9 R10: "RESISTOR, 0402 1.8K Ohms +/-1% 1/16 W", Manufacturer_Name=KEMET, Mouser Part Number=603-RC0402FR-071K8L, Arrow Part Number=RC0402FR-071K8L, Arrow Price/Stock=https://www.arrow.com/en/products/rc0402fr-071k8l/yageo, Datasheet Link=http://www.yageo.com/documents/recent/PYu-RC0402_51_RoHS_L_6_r.pdf, Geometry.Height=0.4mm, Manufacturer_Part_Number=RC0402FR-071K8L, Mouser Price/Stock=https://www.mouser.co.uk/ProductDetail/Yageo/RC0402FR-071K8L/?qs=YUgVZYePFqBqgTt42z3XkQ%3D%3D
R4: library part ERJ-2RKF4752X, "AC0402FR-071KL;  0402 1KΩ ±1% 1/16W ±100ppm/℃", Manufacturer_Name=Panasonic, Mouser Part Number=667-ERJ-2RKF4752X, Arrow Part Number=ERJ-2RKF4752X, Arrow Price/Stock=https://www.arrow.com/en/products/erj-2rkf4752x/panasonic, Datasheet Link=https://industrial.panasonic.com/cdbs/www-data/pdf/RDA0000/AOA0000C86.pdf, Geometry.Height=0.4mm, Manufacturer_Part_Number=ERJ-2RKF4752X, Mouser Price/Stock=https://www.mouser.co.uk/ProductDetail/Panasonic/ERJ-2RKF4752X?qs=YMBIwoNQYdVljEm11tR4kg%3D%3D
TP1 TP2 TP3 TP4 TP5 TP6 TP7: Manufacturer=N.A., Artikkelnr Noca=N.A., Author=rsk, Component Class=Connectors, ComponentLink1Description=Datasheet, ComponentLink1URL=N.A., ComponentLink2Description="Supplier link", ComponentLink2URL=N.A., Footprint Doc=Solderbridge, HelpURL=N.A., LatestRevisionDate=2009-12-14, Manufacturer Part Number=N.A., Note=N.A., Pad Count=2, PartId=100500458, Part Number=Solderbridge, Part number IPS=N.A., Part number Norautron=N.A., Published=2009-12-14, Supplier 1=N.A., Supplier 2=N.A., Supplier Part Number 1=N.A., Supplier Part Number 2=N.A.
U1: "Image Sensors PYTHON480 1/3.6 BW_ CRA", Manufacturer_Name=onsemi, Mouser Part Number=863-NOIP1SP0480A-STI, Datasheet Link=https://www.onsemi.com/pdf/datasheet/noip1sn0480a-d.pdf, Geometry.Height=0.75mm, Manufacturer_Part_Number=NOIP1SP0480A-STI, Mouser Price/Stock=https://www.mouser.co.uk/ProductDetail/ON-Semiconductor/NOIP1SP0480A-STI?qs=MLItCLRbWsyoZFKf%252BDS9uw%3D%3D
U2: "MCU 8-bit ATmega AVR RISC 32KB Flash Atmel ATMEGA328-MU, 8bit AVR Microcontroller, 20MHz, 32 kB Flash, 32-Pin MLF", Manufacturer_Name=Microchip, Mouser Part Number=556-ATMEGA328-MU, Arrow Part Number=ATMEGA328-MU, Arrow Price/Stock=https://www.arrow.com/en/products/atmega328-mu/microchip-technology?region=europe, Datasheet Link=https://componentsearchengine.com/Datasheets/2/ATMEGA328-MU.pdf, Geometry.Height=1mm, Manufacturer_Part_Number=ATMEGA328-MU, Mouser Price/Stock=https://www.mouser.co.uk/ProductDetail/Microchip-Technology-Atmel/ATMEGA328-MU?qs=lwdSMh1%2FoYLgRc0I%252Bdg4Ag%3D%3D
U3: Manufacturer_Name="Texas Instruments", Mouser Part Number=595-TLV7103318DSER, Arrow Part Number=TLV7103318DSER, Arrow Price/Stock=https://www.arrow.com/en/products/tlv7103318dser/texas-instruments?region=nac, Datasheet Link=https://pdf1.alldatasheet.com/datasheet-pdf/view/457316/TI1/TLV7103318DSER.html, Geometry.Height=0.8mm, Manufacturer_Part_Number=TLV7103318DSER, Mouser Price/Stock=https://www.mouser.co.uk/ProductDetail/Texas-Instruments/TLV7103318DSER?qs=UlfnwZ2x8nSAnP31dntgZA%3D%3D
U4: library part NCP114AMX330TBG, "NCP163(Vi 2.2-5..5V); Linear Voltage Regulator IC Positive Fixed 1 Output 250mA 4-UDFN _1.0x1.0_", Package="UDFN-4 ON Semiconductor", Availability=Unavailable, MF="ON Semiconductor", MP=NCP114AMX330TBG, Price=None, SnapEDA_Link=https://www.snapeda.com/parts/NCP114AMX330TBG/ON%20Semiconductor/view-part/711351/?ref=snap
U5: "Single Low-Voltage Rail-to-Rail Output Operational Amplifier  see LMV321A for upgraded version", Manufacturer_Name="Texas Instruments", Mouser Part Number=595-LMV321IDCKR, Arrow Part Number=LMV321IDCKR, Arrow Price/Stock=https://www.arrow.com/en/products/lmv321idckr/texas-instruments?region=nac, Datasheet Link=http://www.ti.com/lit/ds/symlink/lmv324.pdf, Geometry.Height=1.1mm, Manufacturer_Part_Number=LMV321IDCKR, Mouser Price/Stock=https://www.mouser.co.uk/ProductDetail/Texas-Instruments/LMV321IDCKR?qs=p6YqzpSxLIzuatXd1sAikQ%3D%3D
U6: "Interface - Signal Buffers, Repeaters I2C/SMBus IC REDRIVER I2C 2CH 400KHZ 8XQFN Repeater Buffer, ReDriver 2 Channel 400kHz 8-XQFN (1.6x1.6)", Arrow Part Number=PCA9509PGM,125, Manufacturer_Name=NXP, Mouser Part Number=771-PCA9509PGM,125, Arrow Price/Stock=https://www.arrow.com/en/products/pca9509pgm125/nxp-semiconductors?region=nac, Datasheet Link=http://www.nxp.com/docs/en/data-sheet/PCA9509P.pdf, Geometry.Height=0.5mm, Manufacturer_Part_Number=PCA9509PGM,125, Mouser Price/Stock=https://www.mouser.co.uk/ProductDetail/NXP-Semiconductors/PCA9509PGM125?qs=vnbNJPHmPnOjnFlZ8zO94w%3D%3D
U7: library part TSOP57238TT1, "Remote Receiver Sensor, 38.0kHz 40m Surface Mount", Package=None, Availability=Warning, Check_prices=https://www.snapeda.com/parts/TSOP57238TT1/Vishay%20Semiconductor%20Opto%20Division/view-part/395850/?ref=eda, MF="Vishay Semiconductor", MP=TSOP57238TT1, Price=None, Purchase-URL=https://pricing.snapeda.com/search/part/TSOP57238TT1/?ref=eda, SnapEDA_Link=https://www.snapeda.com/parts/TSOP57238TT1/Vishay%20Semiconductor%20Opto%20Division/view-part/395850/?ref=snap
U9: "BUCK, SYNCH, DUAL, 0.8A, 2.25MHZ, 10MSOP", Manufacturer_Name="Analog Devices", Mouser Part Number=584-LTC3407EDD-3#PBF, Arrow Part Number=LTC3407EDD-3#PBF, Arrow Price/Stock=https://www.arrow.com/en/products/ltc3407edd-3pbf/analog-devices, Datasheet Link=https://datasheet.datasheetarchive.com/originals/distributors/SFDatasheet-4/sf-00091830.pdf, Geometry.Height=0.8mm, Manufacturer_Part_Number=LTC3407EDD-3#PBF, Mouser Price/Stock=https://www.mouser.com/Search/Refine.aspx?Keyword=584-LTC3407EDD-3%23PBF
U10: library part NCP705, "Ultra-Low Quiescent Current, Ultra-Low Noise, LDO Voltage Regulator<br> <br> Data sheet: <br> http://www.onsemi.com/pub_link/Collateral/NCP705-D.PDF<br>", Package=None, Availability=Unavailable, MP=NCP705, Price=None
X1: library part SG-210STF_62.5000ML3, "Standard Clock Oscillators 66.6666MHz 50ppm -40C +85C", Manufacturer_Name="Epson Timing", Manufacturer_Part_Number="SG-210STF 62.5000ML3", Mouser Part Number=732-SG210STF62.500L3, Datasheet Link="https://componentsearchengine.com/Datasheets/1/SG-210STF 62.5000ML3.pdf", Geometry.Height=0.9mm, Mouser Price/Stock=https://www.mouser.co.uk/ProductDetail/Epson-Timing/SG-210STF-62.5000ML3?qs=6J2kD0vu%2F2XqkCRh4YYW9A%3D%3D

## Via types
v1: diameter 0.35, hole 0.2, Top Layer to Bottom Layer, tented both sides, 97 vias
v2: diameter 0.35, hole 0.15, Top Layer to Bottom Layer, tented both sides, 53 vias
v3: diameter 0.356, hole 0.2, Top Layer to Bottom Layer, tented both sides, 13 vias
v4: diameter 0.356, hole 0.178, Top Layer to Bottom Layer, tented both sides, 1 vias

## Nets (pads, with @x,y where several pads share a name; then routed paths per layer and width w, separated by ;. In a path a pad name is that pad's centre, name@x,y a point inside that pad or via, vN(x,y) a via of type N, cw(c..) or ccw(c..) an arc to the next point about the centre after c; other vN are vias at no path point)
GND: C1.1 C2.1 C3.1 C4.1 C5.1 C6.1 C7.2 C8.2 C9.2 C10.2 C11.2 C12.1 C13.2 C14.2 C15.2 C16.1 C17.2 C18.2 C19.2 C20.2 C21.2 C22.1 C23.2 C24.2 C25.2 C26.1 C27.2 C28.2 C29.1 C30.2 C31.1 C32.1 C33.2 C34.1 C35.2 J1.2 J2.2 J3.18 J4.17 J5.5 Q1.2 R1.2 R6.2 U1.A3 U1.A6 U1.A11 U1.B2 U1.B3 U1.C2 U1.D2 U1.E2 U1.G2 U1.G6 U1.G7 U1.G8 U1.G11 U1.H5 U1.H7 U1.H8 U2.3 U2.5 U2.21 U2.33 U3.4 U4.2 U4.5 U5.2 U6.4 U7.6 U7.8 U9.5 U9.11 U10.GND X1.2 | length 134.1
  Top Layer w0.15: R1.2@95.805,91.176 95.846,91.176 96.33,91.66 96.56,91.66 97.213,92.313 X1.2@97.5,92.313 ; C24.2@96.404,94.815 96.93,95.341 96.93,96.5 v2(97.17,96.74) ; C4.1@99.18,71.192 C4.1@99.208,71.22 ; C11.2@99.387,90.57 99.878,90.08 100.3,90.08 100.457,89.923 Q1.2@100.457,89.688 100.658,89.688 101.347,90.377 101.665,90.06 103.09,90.06 103.546,89.604 C15.2@103.546,89.43 103.61,89.43 103.94,89.76 103.94,91.01 C14.2@104.362,91.432 ; U4.5@100.614,70.72 U4.5@100.614,70.895
  Top Layer w0.25: U7.8@146.277,90.189 147,90.912 147,91.38 147.19,91.57 v1(147.62,91.57) ; U7.6@146.277,93.189 146.939,93.189 147.22,93.47 147.49,93.47 147.679,93.659 C25.2@147.679,94.453 147.679,95.49 C26.1@147.636,95.533 ; J5.5@151.481,91.342 151.481,91.219 152.075,90.625 R6.2@152.075,90.16
  Top Layer w0.3: C24.2@96.404,94.815 96.468,94.75 C20.2@97.5,94.75 ; C10.2@100.411,95.44 101.197,95.44 C8.2@101.507,95.75 ; C9.2@102.3,92.896 102.704,92.896 103.05,92.55 C12.1@103.5,92.55 104.562,92.55 C13.2@104.58,92.568 104.58,91.512 C14.2@104.508,91.44 ; C19.2@103.34,91.432 104.362,91.432 C14.2@104.5,91.432 ; C6.1@103.42,94.64 103.491,94.568 C7.2@104.5,94.568 ; C22.1@103.42,97.45 103.438,97.432 C23.2@104.5,97.432
  Top Layer w0.304: C4.1@99.18,71.192 100.261,71.192 U4.2@100.289,71.22 100.289,71.045 U4.5@100.614,70.72 ; C1.1@99.812,67.58 101.358,67.58 C2.1@101.58,67.802 ; U3.4@100.145,65.095 100.281,64.958 C3.1@101.53,64.958
  Top Layer w0.4: 127.37,69.1 129.36,69.1 J4.17@129.54,68.92
  Signal Layer 1 w0.25: v1(134.54,87.42) 136.61,87.42 137.66,88.47 137.66,90.16 138.01,90.51 146.79,90.51 147.21,90.93 147.21,92.2 147.96,92.95 147.96,94.41 v1(147.75,94.62)
  Signal Layer 1 w0.3: v2(103.34,91.44) 104.63,91.44 105.35,92.16 108.35,92.16 108.68,92.49 121.4,92.49 122.24,93.33 123.52,93.33 124.04,93.85 131.32,93.85 132.49,92.68 132.49,87.94 v1(132.99,87.44)
  Signal Layer 1 w0.4: v1(95.3,69.41) 95.3,70.12 97.83,72.65 v2(97.83,88.19)
  Bottom Layer w0.15: U1.G2@98,94.25 98.4,93.85 98.4,93.65 U1.E2@98,93.25 U1.D2@98,92.75 v4(98,92.25) U1.B2@98,91.75 U1.B3@98.5,91.75 U1.A3@98.5,91.25 ; v2(99.26,97.5) v2@99.31,97.45 ; U1.H5@99.5,94.75 99.5,95.62 99.86,95.98 101.21,95.98 v2(101.27,96.04) ; U1.G6@100,94.25 U1.G7@100.5,94.25 U1.G8@101,94.25 v2(101,94.75) U1.H7@100.5,94.75 ; U1.G11@102.5,94.25 103,94.25 v2(103.25,94.5)
  Bottom Layer w0.25: C27.2@145.425,94.362 C28.2@146.585,94.362 147.232,94.362 147.49,94.62 v1(147.75,94.62) ; U2.3@147.916,91.556 149.615,91.556 U2.33@150.366,92.306 ; U2.5@147.916,92.556 150.116,92.556 U2.33@150.366,92.306 ; U2.21@152.816,92.056 150.616,92.056 U2.33@150.366,92.306
  Bottom Layer w0.3: U1.A11@102.5,91.25 103.15,91.25 v2(103.34,91.44)
  Bottom Layer w0.304: v1@95.3,68.06 v1(95.31,68.05)
  Bottom Layer w0.4: J1.2@95.31,65.96 v1(95.31,68.05)
  other v1: 114.36,63.05 113.89,64.43 115.18,64.85 95.1,65.39 115.18,66.24 128.82,68.63 112.66,69.08 130.21,69.18 115.8,70.22 113.43,72.95 116.82,72.99 115.63,73.03 113.43,74.03 116.43,75.4 114.47,75.49 100.67,88.25 151.97,90.85 150.66,91.75 146.8,92.03
  other v2: 100,91.25 104.45,97.44
  other v3: 101.57,64.96 100.2,67.61 102.32,70.35 99.109,71.189
NetC1_2: C1.2 C4.2 C29.2 C32.2 C33.1 J1.1 J2.1 R11.2 U3.1 U3.2 U3.3 U4.3 U4.4 U9.2 U9.3 U9.6 U9.9 U10.4 U10.6 | length 25.5
  Top Layer w0.304: v1(94.14,67.25) v1@94.17,67.28 ; 94.59,66.77 94.81,66.55 97.07,66.55 ; U3.3@98.945,65.095 U3.2@98.945,65.595 U3.1@98.945,66.095 U3.1@98.948,66.098 ; C4.2@98.948,70.096 C4.2@99.18,70.328 100.181,70.328 U4.3@100.289,70.22 100.679,69.83 100.839,69.83 100.939,69.931 U4.4@100.939,70.22 ; C29.2@113.1,62.97 113.1,63.3 113.59,63.79 115.67,63.79 116.05,63.41 R11.2@116.05,63.01 116.46,63.01 116.67,63.22 U9.6@116.67,64.444 ; U9.3@113.67,65.444 U9.2@113.67,65.944 ; U10.4@114.385,72.84 114.62,72.84 115.06,73.28 115.06,73.49 115.462,73.892 C32.2@115.67,73.892 ; U10.6@114.385,74.16 115.402,74.16 C32.2@115.67,73.892 ; C33.1@116.83,73.882 115.68,73.882 C32.2@115.67,73.892
  Top Layer w0.4: v1(94.14,67.25) 94.14,67.14 v1(94.41,66.87) ; v1@94.17,67.28 J2.1@94.17,68.675 ; C1.2@98.948,67.58 C4.2@98.948,70.096
  Bottom Layer w0.304: v3(112.98,63.23) 112.98,65.16 v3(113.3,65.48) ; v3(116.99,65.95) 116.99,64.46 v3(117.04,64.41)
  other v1: 98.56,64.93
  other v3: 113.72,65.94 114.61,72.82
NetC5_2: C5.2 TP4.2 U4.1 | length 3.3
  Top Layer w0.25: U4.1@100.939,71.22 102.032,71.22 102.09,71.162 102.604,71.162 103.611,72.169 TP4.2@103.76,72.318
NetC16_2: C16.2 C17.1 C18.1 C19.1 L1.2 U1.A1 U1.B6 U1.B10 | length 29.3
  Top Layer w0.15: C17.1@99.818,88.25 98.845,88.25 v1(98.765,88.17) 98.765,88.705 98.47,89 98.47,89.915 98.17,90.215 98.17,90.54 97.5,91.21 v2(97.5,91.25) 97.5,91.35 97.75,91.6 98.43,91.6 98.75,91.28 99.53,91.28 v2(100,91.75) 100,91.83 100.41,92.24 101.84,92.24 102,92.08 v2(102,91.75) 102.58,91.75 102.865,91.465 102.865,91.09 103.34,90.615 C19.1@103.34,90.568 103.318,90.59 C18.1@102.211,90.59
  Signal Layer 2 w0.304: v1(98.765,88.17) 99.115,87.82 v1(99.115,72.63)
NetC22_2: C22.2 C23.1 L2.2 U1.H6 | length 6.3
  Top Layer w0.15: L2.2@102.139,97.095 102.685,96.55 C22.2@103.42,96.55 104.482,96.55 C23.1@104.5,96.568
  Bottom Layer w0.15: v2(100,94.75) 100.78,95.53 101.86,95.53 101.99,95.66 101.99,96.99 v2(102,97)
NetC27_1: C27.1 R7.2 U2.27 U6.2 | length 14.6
  Top Layer w0.2: v1(145.278,93.498) 145.38,93.6 R7.2@145.38,94.575
  Bottom Layer w0.15: v1(145.278,93.498) 144.88,93.1 144.88,92.755 144.68,92.555 144.68,92.265 144.88,92.065 144.88,91.275 144.615,91.01 144.615,89.215 145.05,88.78 150.7,88.78 151.12,89.2 151.116,89.204 U2.27@151.116,89.856
  Bottom Layer w0.2: C27.1@145.425,93.498 145.642,93.498 146.04,93.1 U6.2@146.04,92.605
NetC28_1: C28.1 R8.2 U2.28 U6.3 | length 9.9
  Top Layer w0.2: R8.2@146.55,94.575 146.55,93.74 v1(146.6,93.69)
  Bottom Layer w0.15: U6.3@146.54,92.605 147.015,92.605 147.22,92.4 147.22,89.28 147.47,89.03 150.38,89.03 150.616,89.266 U2.28@150.616,89.856
  Bottom Layer w0.2: U6.3@146.54,92.605 146.54,93.452 C28.1@146.585,93.498
NetC34_2: C34.2 C35.1 TP7.2 U10.1 | length 7.1
  Top Layer w0.304: TP7.2@111.195,75.4 111.195,75.047 111.195,74.815 111.85,74.16 U10.1@112.535,74.16 ; 111.364,75.47 C34.2@113.58,75.47 113.58,75.1 113.85,74.83 115.008,74.83 C35.1@115.578,75.4
NetD1_1: D1.1 R3.2 | length 1.6
  Top Layer w0.15: R3.2@96.75,90.126 97.466,89.41 D1.1@98.025,89.41
NetD1_2: D1.2 Q1.3 | length 0.9
  Top Layer w0.15: D1.2@98.915,89.41 99.704,89.41 Q1.3@99.757,89.463
NetJ3_1: J3.1 U1.B9 | length 32.7
  Top Layer w0.15: v1(121.5,97.57) 121.505,97.565 J3.1@129.54,97.565
  Top Layer w0.2: J3.1@129.275,97.83 J3.1@129.54,97.565
  Signal Layer 1 w0.15: v2(101.5,91.75) 101.505,91.75 102.275,92.52 104.739,92.52 105.009,92.79 105.465,92.79 106.27,93.595 106.27,96.72 106.6,97.05 120.04,97.05 120.56,97.57 v1(121.5,97.57)
NetJ3_2: J3.2 U1.C9 | length 36.6
  Top Layer w0.15: v1(119.08,97.56) 119.64,97.56 120.31,96.89 132.04,96.89 132.715,97.565 J3.2@133.64,97.565
  Signal Layer 1 w0.15: v2(101.49,92.81) 101.804,93.124 103.871,93.124 103.935,93.06 104.225,93.06 104.72,93.555 104.72,94.22 105.06,94.56 105.06,96.17 106.45,97.56 v1(119.08,97.56)
  Bottom Layer w0.15: v2(101.49,92.81) 101.49,92.26 U1.C9@101.5,92.25
NetJ3_3: J3.3 U1.A9 | length 32.7
  Top Layer w0.15: v1(122.91,96.3) 122.915,96.295 J3.3@129.54,96.295
  Signal Layer 1 w0.15: v2(101.5,91.25) 101.5,91.03 101.66,90.87 102.32,90.87 102.69,91.24 102.69,91.73 102.963,92.003 104.577,92.003 105.113,92.54 105.569,92.54 106.55,93.521 106.55,96.24 106.85,96.54 119.77,96.54 120.01,96.3 v1(122.91,96.3)
NetJ3_4: J3.4 U1.C8 | length 35.4
  Top Layer w0.15: v1(123.6,95.65) 132.3,95.65 132.945,96.295 J3.4@133.64,96.295
  Signal Layer 2 w0.15: v2(101.54,93.49) 101.54,93.41 102.9,93.41 103.36,92.95 104.57,92.95 104.68,93.06 104.68,93.42 106.91,95.65 v1(123.6,95.65)
  Bottom Layer w0.15: U1.C8@101,92.25 101,92.98 101.51,93.49 v2(101.54,93.49)